# Altium PCB PCB2.PcbDoc (part 3 of 3)
Units mm, origin at the board's own origin, x right, y up, seen from the top; angles counter-clockwise.
Board outline 152.4 x 101.6 mm, 4 copper layers (Top Layer, Int1 (GND), Int2 (PWR), Bottom Layer), stack 1.569 mm thick; 115 components, 81 nets, 561 pads, 241 vias.
Unrouted connection lines stored in the file: 9.
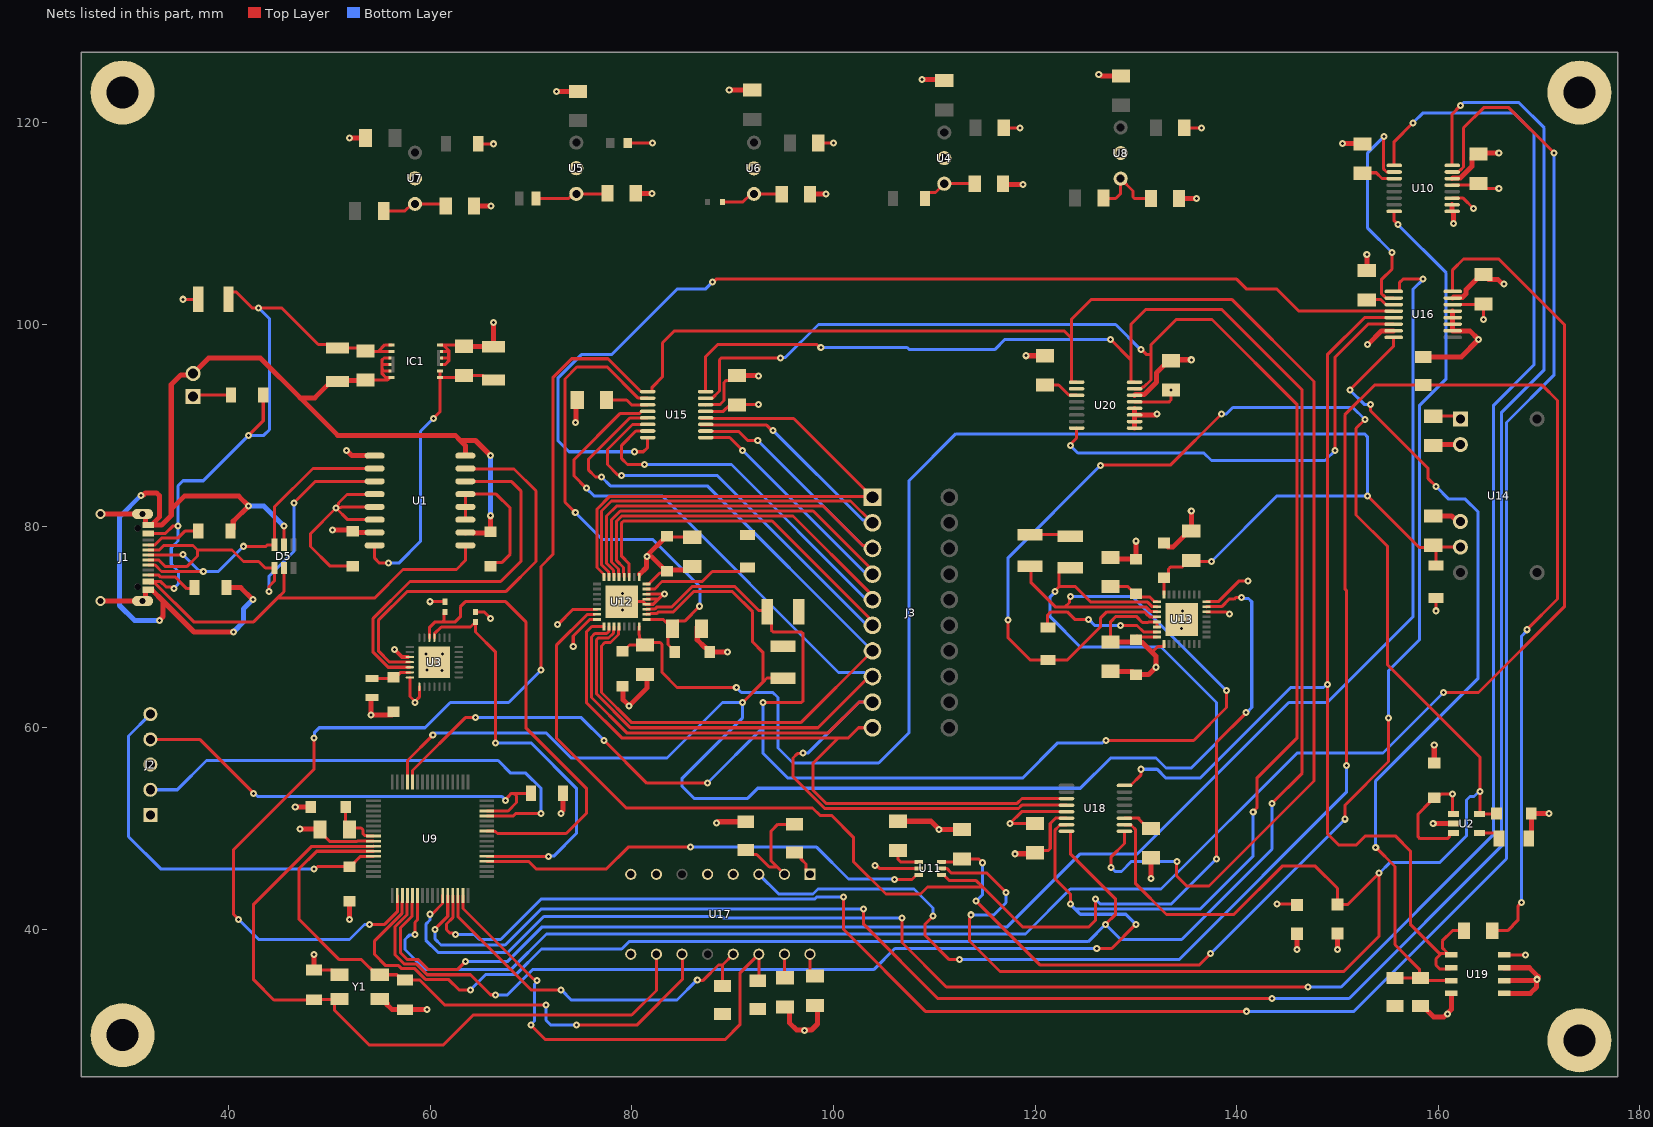
[diagram p4: the nets of this part, all layers, seen from the top]

## Via types
v1: diameter 0.7, hole 0.3, Top Layer to Bottom Layer, 241 vias

## Nets (pads, with @x,y where several pads share a name; then routed paths per layer and width w, separated by ;. In a path a pad name is that pad's centre, name@x,y a point inside that pad or via, vN(x,y) a via of type N, cw(c..) or ccw(c..) an arc to the next point about the centre after c; other vN are vias at no path point) (continued)
2Y6: U11.4 U12.15 U13.15 | length 130.5
  Top Layer w0.3: U12.15@76.295,71.237 75.587,71.237 72.525,68.175 72.525,58.975 79.45,52.05 97.937,52.05 98.679,51.308 99.822,51.308 101.981,49.149 101.981,46.736 105.217,43.5 108.633,43.5 109.329,44.196 114.804,44.196 ; U11.4@110.725,45.4 110.95,45.4 111.519,44.831 114.169,44.831 114.804,44.196 ; v1(126,43) 126,40.9 125.35,40.25 118.75,40.25 114.804,44.196 ; U13.15@137,72 137.013,72.013 138.513,72.013 139.252,72.752 139.752,72.752 139.922,72.922 140.453,72.922 v1(140.475,72.9) ; v1(138,47) 138,58.553 v1(140.947,61.5)
  Bottom Layer w0.3: v1(126,43) 126.5,42.5 133.5,42.5 v1(138,47) ; v1(140.475,72.9) 140.552,72.823 141.177,72.823 141.5,72.5 141.5,62 141,61.5 v1(140.947,61.5)
5V_ISO: C2.2 C4.2 C6.2 C22.1 C38.2 C40.2 C46.1 C47.1 C49.1 D3.2 F1.2 IC1.7 IC1.8 R4.2 R5.2 R6.2 R8.2 R12.2 U1.16 U2.1 U2.3 U3.7 U3.8 U10.11 U10.13 U12.14 U13.14 U14.1 U15.13 U16.14 U18.13 U19.8 U20.13 | length 100.7
  Top Layer w0.3: v1(35.5,102.5) F1.2@37,102.5 ; U1.16@54.5,78.094 54.5,76.818 54.991,76.327 v1(55.88,76.327) ; U3.7@58,65 58,63.108 58.5,62.608 v1@58.5,62.606 ; v1(58.5,62.5) v1@58.5,62.606 ; U3.8@58.925,64.075 58.925,63.031 v1@58.5,62.606 ; v1(60.325,90.678) 60.96,91.313 IC1.7@60.96,94.727 ; IC1.8@60.96,95.377 IC1.7@60.96,94.727 ; C4.2@63.348,94.967 63.108,94.727 IC1.7@60.96,94.727 ; C4.2@63.373,94.943 65.24,94.943 65.694,94.489 C2.2@66.294,94.489 ; R6.2@64.775,117.925 v1(66.275,117.925) ; v1(72.65,70.225) 74.175,71.75 U12.14@76.548,71.75 ; R4.2@79.59,117.983 v1(82.042,117.983) v1@82.025,118 ; U15.13@87.33,91.384 87.861,91.384 87.884,91.361 87.907,91.384 89.084,91.384 89.75,92.05 C40.2@90,92.05 ; C40.2@90.674,92.022 90.727,92.075 v1(92.583,92.075) ; R5.2@98.5,118 v1(100,118) ; R8.2@116.9,119.5 v1(118.5,119.5) ; C47.1@120,50.5 v1(117.5,50.5) 118.675,51.675 U18.13@123.125,51.675 ; U20.13@129.875,92.325 133.324,92.325 133.5,92.501 v1(133.5,93.5) ; R12.2@134.8,119.5 v1(136.5,119.5) ; U13.14@137,71.5 138.967,71.5 139.192,71.275 v1(139.3,71.275) ; v1(144,42.5) 145.93,42.5 D3.2@146,42.43 ; C38.2@159.5,90.9 161.91,90.9 U14.1@162.19,90.62 ; C6.2@159.6,53.05 159.525,53.05 159.15,52.675 159.15,52.6 158,51.45 158,49.176 158.176,49 160.924,49 161.1,49.176 161.1,49.4 161.25,49.55 U2.3@161.5,49.55 ; C6.2@159.906,53.03 160.299,53.423 v1(161.423,53.423) 161.423,51.527 U2.1@161.5,51.45 ; U10.11@161.375,112.525 162.475,112.525 v1(163.5,111.5) ; U10.13@161.375,113.825 163.825,113.825 C22.1@164,114 164.5,113.5 v1(166,113.5) ; U16.14@161.425,101.975 163.975,101.975 C46.1@164,102 ; v1(164.5,100.5) C46.1@164.5,102.05 ; U19.8@166.54,37.465 v1(168.656,37.465)
  Bottom Layer w0.3: v1(55.88,76.327) 56.896,76.327 59.055,78.486 59.055,89.408 v1(60.325,90.678)
9V: C27.2 C28.2 C35.2 C36.2 C37.2 R26.2 U12.24 U13.24 U14.6 | length 158.4
  Top Layer w0.3: C28.2@79.075,67.575 79.15,67.575 79.775,68.2 C27.2@81.325,68.2 ; U12.24@80.75,70.048 80.737,70.035 80.737,69.213 80.75,69.2 80.75,68.95 C27.2@81.25,68.45 ; C27.2@81.5,68.45 82.824,68.45 83,68.274 83,65.5 84.5,64 v1(90.369,64) ; U13.24@132.798,73.202 132.798,74.999 132.998,74.999 133.248,75.249 133.248,75.749 133.423,75.925 134.575,75.925 135.25,76.6 C35.2@135.5,76.6 ; C35.2@135.545,76.5 v1(137.5,76.5) ; v1@153.016,82.984 158.121,77.879 159.279,77.879 C37.2@159.5,78.1 159.766,77.834 R26.2@159.766,76.073 ; C37.2@159.68,77.92 U14.6@162.19,77.92
  Bottom Layer w0.3: v1(90.369,64) 90.869,63.5 94,63.5 94.5,63 94.5,58 96,56.5 104.5,56.5 107.5,59.5 107.5,84.5 112.15,89.15 152.674,89.15 153,88.824 v1(153,83) 144,83 v1(137.5,76.5)
D: C24.2 U10.8 U11.6 | length 120.4
  Top Layer w0.3: U11.6@110.725,46.7 112.736,46.7 112.776,46.74 C24.2@112.776,46.99 114.427,46.99 v1(114.808,46.609) ; v1(114.148,42.799) 114.173,42.799 120.523,36.449 136.271,36.449 v1(137.414,37.592) ; v1(150.749,50.927) 150.749,52.324 155.067,56.642 v1(155.067,60.96) ; U10.8@155.625,111.225 155.625,110.286 v1(156.005,109.906)
  Bottom Layer w0.3: v1(114.148,42.799) 114.808,43.459 v1(114.808,46.609) ; v1(137.414,37.592) v1(150.749,50.927) ; v1(155.067,60.96) 155.067,65.659 158.115,68.707 158.115,91.948 160.782,94.615 160.782,105.129 v1(156.005,109.906)
DA: R33.2 R34.2 U16.8 U19.3 | length 83.4
  Top Layer w0.3: v1(151.227,93.502) 155.554,97.83 U16.8@155.554,98.725 ; v1(153.274,92.075) 153.274,91.455 159.004,85.725 159.004,84.709 v1(159.766,83.947) ; v1(153.797,48.133) 155.702,46.228 155.702,38.481 158.127,36.056 158.127,35.522 R34.2@158.242,35.407 ; R33.2@155.702,35.182 R34.2@158.242,35.182 ; R34.2@158.366,35.306 158.747,34.925 U19.3@161.29,34.925
  Bottom Layer w0.3: v1(151.227,93.502) 152.654,92.075 v1(153.274,92.075) ; v1(153.797,48.133) 153.797,54.737 163.957,64.897 163.957,81.407 162.687,82.677 161.036,82.677 v1(159.766,83.947)
DATA_N: U1.6 U3.5 | length 37.5
  Top Layer w0.3: U3.5@58,66 55.839,66 54.35,67.489 54.35,70.85 58,74.5 67,74.5 69,76.5 69,83.5 68.095,84.405 U1.6@63.5,84.405
DATA_P: U1.7 U3.4 | length 39.6
  Top Layer w0.3: U3.4@58,66.5 55.975,66.5 54.9,67.575 54.9,70.7 57.7,73.5 67.5,73.5 70.5,76.5 70.5,83.5 68.325,85.675 U1.7@63.5,85.675
DN1: D5.4 J1.A7 J1.B7 U1.11 | length 41
  Top Layer w0.3: J1.A7@32.075,76.638 32.573,76.638 32.575,76.64 33.088,76.64 33.728,76 33.99,76 33.997,76.007 35.905,76.007 36.925,77.027 36.925,77.64 ; J1.B7@32.075,77.64 33.14,77.64 33.575,78.075 36.49,78.075 36.925,77.64 ; v1(44,73.5) 44.016,73.516 44.016,74.016 44.55,74.55 D5.4@44.55,75.85 43.65,75.85 43,76.5 41.493,76.5 40.353,77.64 36.925,77.64 ; v1(46.482,82.296) 48.63,84.444 U1.11@54.5,84.444
  Bottom Layer w0.3: v1(44,73.5) 44,75 46.482,77.482 v1(46.482,82.296)
DP1: D5.3 J1.A6 J1.B6 U1.10 | length 35.3
  Top Layer w0.3: J1.B6@32.061,76.138 32.725,76.138 33.364,75.5 v1(37.5,75.5) ; J1.A6@32.061,77.138 35.438,77.138 v1(35.475,77.175) ; v1(41.5,78) 43.72,78 43.87,78.15 D5.3@44.55,78.15 44.55,81.888 48.376,85.714 U1.10@54.5,85.714
  Bottom Layer w0.3: v1(35.475,77.175) 37.073,75.577 37.423,75.577 v1(37.5,75.5) 39,75.5 v1(41.5,78)
GND_ISO: C2.1 C4.1 C5.1 C6.1 C8.1 C9.1 C10.1 C11.1 C12.1 C13.1 C14.1 C15.1 C16.1 C17.1 C18.2 C19.1 C20.2 C21.1 C22.2 C23.1 C24.1 C25.1 C25.2 C26.1 C26.2 C27.1 C28.1 C29.1 C30.1 C31.1 C31.2 C32.1 C32.2 C33.1 C34.1 C35.1 C36.1 C37.1 C38.1 C39.1 C40.1 C41.2 C42.2 C43.2 C44.1 C45.1 C46.2 C47.2 C48.1 C49.2 D1.1 D2.1 D3.1 D4.1 IC1.9 IC1.10 IC1.11 IC1.12 J2.3 pad.MH1 pad.MH2 pad.MH3 pad.MH4 R13.1 R14.1 R15.1 R16.1 R18.1 R19.1 R26.1 R29.1 R30.2 R34.1 U1.9 U1.15 U2.2 U3.3 U3.29 U4.2 U5.2 U6.2 U7.2 U8.2 U9.9 U10.9 U10.10 U10.14 U11.2 U12.1 U12.16 U12.28 U12.29 U12.30 U12.32 U12.HTAB U13.1 U13.16 U13.29 U13.30 U13.32 U13.HTAB U14.2 U14.5 U15.14 U16.7 U16.10 U16.11 U16.12 U16.13 U16.15 U17.4 U17.5 U17.7 U17.8 U17.9 U18.14 U19.4 U19.5 U19.6 U19.7 U20.9 U20.10 U20.11 U20.12 U20.14 Y1.2 Y1.4 | length 271.2
  Top Layer w0.3: C17.1@48.525,35.95 50.25,35.95 50.7,35.5 Y1.4@51,35.5 ; C42.2@49.096,49.911 49.096,49.661 50.046,48.711 52.77,48.711 52.809,48.75 U9.9@54.374,48.75 ; C8.1@52.325,79.475 C8.1@52.436,79.364 ; U1.9@53.8,86.945 U1.9@54.5,86.945 ; Y1.2@55,33.1 55.3,33.1 Y1.2@55.75,32.65 ; C11.1@56.2,61.25 C11.1@56.5,61.55 ; v1(60,72.5) D2.1@61.5,72.5 ; U3.29@60.425,66.5 v1(61.25,67.325) ; IC1.12@60.96,97.977 61.281,97.977 ; IC1.9@61.11,96.027 61.125,96.012 61.468,96.012 61.849,96.393 61.849,96.772 ; IC1.10@61.11,96.677 61.754,96.677 61.849,96.772 ; IC1.11@61.11,97.327 61.673,97.327 61.849,97.151 ; C4.1@63.373,97.843 63.239,97.977 61.281,97.977 ; D1.1@64.5,71.5 65.351,71.5 v1(66,70.851) ; v1(73,51.5) 73,51.608 73.2,51.808 ; v1(74.2,68.075) 74.2,69.1 75.85,70.75 U12.16@76.548,70.75 ; U12.HTAB@79,72.5 81.14,72.5 U12.28@81.39,72.25 ; U12.1@80.75,74.952 U12.1@80.75,75.192 ; U12.28@81.452,72.25 82.142,72.25 82.642,72.75 ; U12.29@81.452,72.75 82.642,72.75 ; U12.30@81.452,73.25 v1@83.142,73.25 ; U12.32@81.452,74.25 81.692,74.25 82.792,75.35 83.2,75.35 C25.1@83.5,75.65 ; v1@81.577,76.923 82.027,76.923 ; v1(83.25,73.25) v1@83.142,73.25 ; C25.2@83.35,78.9 C26.2@86,78.9 ; C26.1@85.65,75.65 C26.1@86,76 ; U15.14@87.33,92.034 87.34,92.044 88.724,92.044 88.9,92.219 89.147,92.467 89.147,93.211 89.154,93.218 89.154,94.246 89.33,94.422 89.547,94.422 89.75,94.625 89.75,94.95 C40.1@90,94.95 ; C30.1@87.35,67.95 C30.1@87.725,67.575 ; v1(104.14,46.355) 104.248,46.355 104.553,46.05 U11.2@108.5,46.05 ; C47.2@120,47.6 120.237,47.837 121.337,47.837 121.512,48.012 121.512,50.512 122.025,51.025 U18.14@123.125,51.025 ; v1(126.324,124.79) 126.432,124.79 v1@126.582,124.64 ; C31.1@127.5,68.5 127.5,70.525 128.025,71.05 130.05,71.05 130.65,70.45 131.205,70.45 131.243,70.487 132.082,70.487 U13.29@132.095,70.5 U13.30@132.095,70 ; C34.1@127.5,76.4 C34.1@127.775,76.675 ; C32.2@129.675,65.6 C32.2@130,65.275 ; C32.1@129.775,68.5 C32.1@130,68.725 ; C32.1@130.1,69 U13.32@132.095,69 ; 131.613,67.487 132.185,68.06 132.785,68.06 132.798,68.073 U13.1@132.798,68.298 ; C36.1@132.798,78.324 C36.1@133.173,77.949 ; C49.2@133.25,96.4 C49.2@133.5,96.4 ; v1(134.548,69.825) U13.HTAB@134.548,70.75 ; C35.1@135.25,79.5 C35.1@135.5,79.5 ; U13.16@137,72.5 138.175,72.5 140.25,74.575 v1(141.125,74.575) ; v1(159.766,71.603) R26.1@159.766,72.873 ; U14.5@161.865,80.46 U14.5@162.19,80.46 ; C46.2@164.5,104.95 C46.2@165,104.45 ; C9.1@168.975,49 C9.1@169.225,49.25 ; 61.281,97.977 61.849,97.409 61.849,97.151 ; 61.849,96.772 61.849,97.151 ; 82.642,72.75 v1@83.142,73.25
  Top Layer w0.4: v1(56.475,67.75) 57.225,67 U3.3@57.825,67
  Top Layer w0.425: U12.1@80.75,75.192 U12.1@80.787,75.229
  Top Layer w0.5: v1(46.625,52.125) C21.1@48.175,52.125 ; v1(47.1,49.95) 49.057,49.95 C42.2@49.096,49.911 ; v1(48.5,37.5) C17.1@48.5,35.975 C17.1@48.525,35.95 ; v1(50.3,79.6) 52.2,79.6 C8.1@52.225,79.575 ; v1(51.689,87.503) 51.743,87.503 52.262,86.984 53.761,86.984 U1.9@53.8,86.945 ; v1(52,41) C19.1@52,42.775 ; v1(52,118.5) C15.1@53.6,118.5 ; C8.1@52.436,79.364 U1.15@54.5,79.364 ; v1(54.15,61.25) 54.15,62.925 C10.1@54.225,63 ; v1@54.2,61.3 54.2,61.292 54.242,61.25 C11.1@56.2,61.25 ; Y1.2@55.75,32.65 55.75,32.525 56.243,32.032 57.493,32.032 C18.2@57.5,32.025 57.55,32.075 v1(59.7,32.075) ; C4.1@63.373,97.843 63.4,97.816 66.267,97.816 C2.1@66.294,97.789 v1(66.294,100.203) ; R15.1@64.35,111.75 v1(66.05,111.75) ; v1(72.526,123.116) C12.1@74.676,123.116 ; 73.2,51.808 R19.1@73.2,53.5 ; v1(74.422,90.297) 74.46,90.335 74.46,92.36 C39.1@74.6,92.5 ; C28.1@79.075,64.125 79.15,64.05 79.15,62.775 v1(79.75,62.175) 81.5,63.925 C27.1@81.5,65.55 ; R14.1@80.4,113 v1(82,113) ; U12.1@80.787,75.229 81.462,75.904 81.462,76.962 v1(81.5,77) ; v1@81.577,76.923 v1(81.5,77) ; 82.027,76.923 83.425,75.525 C25.1@83.5,75.525 ; C25.2@83.35,78.9 81.5,77.05 v1(81.5,77) ; C25.1@83.5,75.65 C26.1@85.65,75.65 ; C29.1@86.5,70 86.5,68.725 87.275,67.95 C30.1@87.35,67.95 ; C30.1@87.725,67.575 C30.1@87.725,67.5 v1(89.5,67.5) ; v1(88.392,50.546) 88.446,50.546 88.578,50.678 91.312,50.678 R30.2@91.313,50.679 ; v1(89.673,123.243) C14.1@91.948,123.243 ; C40.1@90.501,94.945 92.453,94.945 92.529,94.869 v1(92.583,94.869) ; C41.2@95.2,32.3 95.231,32.3 95.631,31.9 95.631,30.734 96.355,30.01 97.117,30.01 v1(97.155,29.972) 97.193,30.01 97.824,30.01 98.425,30.611 98.425,32.205 C43.2@98.171,32.459 ; R16.1@97.675,112.93 v1(99.275,112.93) ; C23.1@106.426,50.726 109.675,50.726 v1(110.49,49.911) 110.511,49.89 C24.1@112.776,49.89 ; v1(108.798,124.285) 110.898,124.285 C13.1@110.998,124.185 ; R13.1@116.825,113.95 116.875,113.9 v1(118.825,113.9) ; v1(118,47.5) 119.9,47.5 C47.2@120,47.6 ; v1(119.1,96.9) C48.1@121,96.9 ; v1@126.582,124.64 C16.1@128.524,124.64 ; C34.1@127.275,76.725 C33.1@130,76.725 v1(130,78.5) ; C31.2@127.5,65.6 C32.2@129.675,65.6 ; C31.1@127.5,68.5 C32.1@129.775,68.5 ; U20.9@129.875,89.725 U20.11@129.875,91.025 ; U20.12@129.875,91.675 U20.11@129.875,91.025 ; U20.14@129.875,92.975 129.95,93.05 130.828,93.05 132.05,94.272 132.05,95.2 C49.2@133.25,96.4 ; C32.2@130,65.275 131.275,65.275 v1(132,66) 132,67.1 131.613,67.487 130.65,68.45 130.35,68.45 130.1,68.7 C32.1@130.1,69 ; v1(131.5,45.05) C45.1@131.5,47.1 ; v1(132.1,91.1) 132.046,91.1 131.971,91.025 U20.11@129.875,91.025 ; C36.1@133.173,77.949 133.699,77.949 C35.1@135.25,79.5 ; C49.2@133.5,96.4 133.6,96.5 v1(135.5,96.5) ; R18.1@134.3,112.5 v1(136,112.5) ; C35.1@135.5,79.5 v1(135.5,81.5) ; v1(146,38) D3.1@146,39.57 ; v1(149.987,38.021) D4.1@149.987,39.591 ; v1(150.5,117.95) 152.45,117.95 C20.2@152.5,117.9 ; C44.1@152.908,105.336 v1(152.908,106.936) ; v1(153,98) 154.365,99.365 155.565,99.365 U16.7@155.575,99.375 ; R34.1@158.242,32.382 158.467,32.382 159.518,31.331 160.563,31.331 160.855,31.623 v1(160.909,31.623) 160.909,31.677 161.29,32.058 U19.4@161.29,33.655 ; R29.1@158.496,96.78 162.28,96.78 v1(164,98.5) 163.125,99.375 U16.10@161.425,99.375 U16.11@161.425,100.025 U16.12@161.425,100.675 U16.13@161.425,101.325 ; v1(159.5,50.5) U2.2@161.5,50.5 ; C37.1@159.5,81 161.325,81 161.674,80.651 161.728,80.651 161.865,80.514 U14.5@161.865,80.46 ; C38.1@159.5,88 159.58,88.08 U14.2@162.19,88.08 ; C6.1@159.6,56.5 v1(159.6,58.275) ; U10.10@161.375,111.875 U10.9@161.375,111.225 161.425,111.225 161.5,111.15 v1(161.5,110) ; U10.14@161.375,114.475 161.45,114.55 162.213,114.55 163.35,115.687 163.35,116.5 163.75,116.9 C22.2@164,116.9 164.1,117 v1(166,117) ; U16.15@161.425,102.625 161.5,102.7 162.413,102.7 162.75,103.037 162.75,103.45 164.35,105.05 C46.2@164.5,105.05 ; C46.2@165,104.45 165.942,104.45 166.292,104.1 166.346,104.1 166.446,104 v1(166.5,104) ; U19.5@166.54,33.655 169.125,33.655 169.761,34.291 v1@169.761,35.014 ; U19.6@166.54,34.925 169.618,34.925 169.745,35.052 v1(169.799,35.052) ; U19.7@166.54,36.195 169.037,36.195 v1@169.93,35.302 ; C9.1@169.225,49.25 C5.1@169.225,51.5 v1(171,51.5)
  other v1: 61.2,65.7 59.675,65.725 59.6,67.325 134.648,71.563 79.1,71.687 79.1,73.313
NetC7_2: C7.2 U1.3 U1.4 U1.5 | length 14.6
  Top Layer w0.3: U1.3@63.5,80.634 U1.4@63.5,81.904 U1.5@63.5,83.174 66.559,83.174 67.945,81.788 67.945,77.216 67.104,76.375 66.375,76.375 C7.2@66,76
NetC8_2: C8.2 U1.12 U1.13 U1.14 | length 22.6
  Top Layer w0.3: C8.2@52.325,76.025 50.086,76.025 48.133,77.978 48.133,79.248 v1(50.673,81.788) ; U1.14@54.5,80.595 54.461,80.634 51.827,80.634 v1(50.673,81.788) ; U1.13@54.5,81.904 51.193,81.904 51.153,81.865 50.75,81.865 v1(50.673,81.788) ; U1.12@54.5,83.135 51.766,83.135 50.922,82.291 50.922,82.145 50.673,81.896 v1(50.673,81.788)
NetC9_2: C9.2 U2.4 | length 2.3
  Top Layer w0.3: U2.4@164.1,49.55 165.65,49.55 166.025,49.175 C9.2@166.025,49
NetC19_2: C19.2 J2.5 U9.12 | length 39.1
  Top Layer w0.3: v1(48.5,46) 48.608,46 48.833,46.225 C19.2@52,46.225 ; C19.2@52.075,46.225 53.1,47.25 U9.12@54.374,47.25
  Bottom Layer w0.3: J2.5@32.25,61.35 30.075,59.175 30.075,49.2 33.275,46 v1(48.5,46)
NetC20_1: C20.1 U10.3 | length 2.9
  Top Layer w0.3: C20.1@153,115.05 153.85,115.05 154.415,114.485 155.615,114.485 U10.3@155.625,114.475
NetC39_2: C39.2 U15.3 | length 4.3
  Top Layer w0.3: C39.2@77.5,92.5 79.5,92.5 79.966,92.034 U15.3@81.58,92.034
NetC44_2: C44.2 U16.3 | length 2.8
  Top Layer w0.3: C44.2@153,102.5 154.278,102.5 154.794,101.985 155.565,101.985 U16.3@155.575,101.975
NetC45_2: C45.2 U18.3 | length 3.1
  Top Layer w0.3: U18.3@128.875,51.025 130.299,51.025 130.299,50.951 131.25,50 C45.2@131.5,50
NetC48_2: C48.2 U20.3 | length 3.5
  Top Layer w0.3: C48.2@121,94 122.35,94 123.365,92.985 124.115,92.985 U20.3@124.125,92.975
NetDS1_1: DS1.1 R1.1 | length 3.8
  Top Layer w0.3: DS1.1@36.5,92.86 36.64,93 R1.1@40.25,93
NetJ1_A5: J1.A5 R3.1 | length 5
  Top Layer w0.3: J1.A5@32.061,78.138 32.71,78.138 33.41,78.838 35.012,78.838 35.674,79.5 R3.1@36.5,79.5
NetJ1_B5: J1.B5 R2.2 | length 5.1
  Top Layer w0.3: J1.B5@32.075,75.14 33.087,75.14 33.289,74.938 34.737,74.938 35.874,73.801 36.526,73.801 R2.2@36.625,73.9
NetJ2_2: J2.2 U9.45 | length 49.1
  Top Layer w0.3: U9.45@65.626,51.25 68.26,51.25 68.526,51.516 v1(71,51.516)
  Bottom Layer w0.3: J2.2@32.25,53.85 34.925,53.85 37.825,56.75 66.75,56.75 68,55.5 69.5,55.5 71,54 v1(71,51.516)
NetJ2_4: J2.4 R19.2 U9.46 | length 45
  Top Layer w0.3: J2.4@32.25,58.85 37.15,58.85 v1(42.5,53.5) ; U9.46@65.626,51.75 67.75,51.75 68.575,52.575 68.575,53.225 68.3,53.5 ; v1(67.5,52.8) 67.5,52.908 67.839,53.248 67.839,53.288 68.051,53.5 68.3,53.5 ; R19.2@70,53.5 68.3,53.5
  Bottom Layer w0.3: v1(42.5,53.5) 42.576,53.5 42.876,53.2 67.1,53.2 v1(67.5,52.8)
NetR7_1: R7.1 R14.2 U5.1 | length 7.3
  Top Layer w0.3: R7.1@70.5,112.5 73.742,112.5 74.202,112.96 U5.1@74.5,112.96 77.56,112.96 R14.2@77.6,113
NetR9_1: R9.1 R15.2 U7.1 | length 6.5
  Top Layer w0.3: R9.1@55.401,111.252 57.494,111.252 58.202,111.96 U7.1@58.5,111.96 61.34,111.96 R15.2@61.55,111.75
NetR10_1: R10.1 R16.2 U6.1 | length 6.2
  Top Layer w0.3: R10.1@88.993,112.141 91.018,112.141 91.827,112.95 U6.1@92.125,112.95 94.855,112.95 R16.2@94.875,112.93
NetR11_1: R11.1 R13.2 U4.1 | length 5.9
  Top Layer w0.3: R11.1@109.1,112.5 109.1,112.75 109.45,113.1 110.14,113.1 U4.1@111,113.96 111.02,113.98 R13.2@114.055,113.98 ; R13.2@114.025,113.95 R13.2@114.145,113.83
NetR17_1: R17.1 R18.2 U8.1 | length 7.3
  Top Layer w0.3: R17.1@127,112.5 128,112.5 128.5,113 U8.1@128.5,114.46 129.71,113.25 129.71,112.64 129.85,112.5 R18.2@131.5,112.5
NetR20_1: R20.1 U12.31 | length 10.9
  Top Layer w0.3: U12.31@81.452,73.75 82.25,73.75 83,74.5 87,74.5 88,75.5 90.724,75.5 90.774,75.55 91.15,75.55 R20.1@91.5,75.9
NetR21_1: R21.1 R24.1 U9.60 U12.27 U13.27 | length 165.5
  Top Layer w0.3: U9.60@58.25,54.626 58.25,55.75 63.5,61 v1(64.5,61) ; v1(77.249,58.751) 81.5,54.5 v1(87.5,54.5) ; U12.27@81.452,71.75 81.465,71.763 81.811,71.763 81.848,71.8 82.328,71.8 82.528,72 84,72 86,74 90.222,74 92.576,71.646 93.279,71.646 R21.1@93.425,71.5 93.85,71.075 93.85,69.676 94.026,69.5 96.824,69.5 97,69.324 97,62.676 96.824,62.5 v1(93,62.5) ; R24.1@119.5,76 119.621,75.879 119.621,74.379 122,72 123,72 ; v1(123.5,73) 123.423,72.923 123.423,72.423 123,72 ; v1(127.048,58.735) 135.735,58.735 139,62 v1(139,63.679) ; U13.27@132.095,71.5 132.082,71.513 131.503,71.513 131.403,71.613 131.382,71.613 130.995,72 123,72
  Bottom Layer w0.3: v1(64.5,61) 75,61 v1(77.249,58.751) ; v1@87.516,54.516 93,60 ; v1(93,62.5) 93,60 ; v1(123.5,73) 129.679,73 v1(139,63.679) ; v1(127.048,58.735) 126.94,58.735 126.705,58.5 122.25,58.5 118.75,55 95.5,55 93,57.5 93,60
NetR22_1: R22.1 R25.1 U9.61 U12.26 U13.26 | length 172.5
  Top Layer w0.3: U9.61@57.75,54.626 57.75,56.75 v1(60.265,59.265) ; U12.26@81.452,71.25 81.465,71.263 81.811,71.263 81.861,71.313 82.477,71.313 82.665,71.5 84.136,71.5 86.136,73.5 90,73.5 92,71.5 92,68.5 93,67.5 93,64.5 ; v1(91,62.5) 93,64.5 ; R22.1@95,64.925 93.425,64.925 93,64.5 ; v1(122,73.5) 122,73.608 122.4,74.008 122.4,75.425 122.825,75.85 R25.1@123.5,75.85 ; 122.5,74 124,74 125.55,72.45 131.181,72.45 131.619,72.013 132.082,72.013 U13.26@132.095,72
  Bottom Layer w0.3: v1(60.265,59.265) 60.5,59.5 71.5,59.5 74,57 83.5,57 89,62.5 v1(91,62.5) 91,61 85,55 85,54.176 86.176,53 91.5,53 92.5,54 124.5,54 127.5,57 132,57 133,56 135.5,56 138,58.5 138,62.5 132.5,68 124.5,68 121.5,71 121.5,73 v1(122,73.5)
NetR23_1: R23.1 U13.31 | length 13.1
  Top Layer w0.3: R23.1@121.3,69.925 121.25,69.975 121.25,71.167 121.575,71.492 123.197,71.492 123.938,70.75 v1(125.325,70.75) ; v1(128.5,70.15) 130.124,70.15 130.774,69.5 U13.31@132.095,69.5
  Bottom Layer w0.3: v1(125.325,70.75) 125.925,70.15 v1(128.5,70.15)
NetR28_1: R28.1 R29.2 U17.3 | length 188.4
  Top Layer w0.3: v1(109.9,41.325) 109.1,40.525 109.1,39.4 111.5,37 v1(112.5,37) ; v1(150.876,56.261) 150.876,73.627 150.725,73.778 150.725,91.035 153.664,93.974 158.49,93.974 R29.2@158.496,93.98 170.307,93.98 171.831,92.456 171.831,72.771 v1(168.783,69.723) ; R28.1@165.357,39.878 166.878,39.878 167.894,40.894 167.894,42.291 v1(168.275,42.672)
  Bottom Layer w0.3: U17.3@92.606,45.463 94.569,43.5 97.98,43.5 98.48,44 108,44 109.875,42.125 109.875,41.35 v1(109.9,41.325) ; v1(112.5,37) 134.282,37 150.876,53.594 v1(150.876,56.261) ; v1(168.275,42.672) 168.275,69.107 168.783,69.615 v1(168.783,69.723)
NetU9_18: U9.18 U15.1 U18.1 U20.1 | length 260.2
  Top Layer w0.3: v1(41,41) 40.5,41.5 40.5,47.9 48.5,55.9 v1(48.5,59) ; v1(54,40.5) 55.5,40.5 56.75,41.75 U9.18@56.75,43.374 ; v1(71,65.706) 71,76 72.175,77.175 72.175,94.725 74.05,96.6 77.644,96.6 80.9,93.344 82.008,93.344 82.022,93.357 82.022,93.776 83.058,94.812 83.058,98.183 84.25,99.375 122.875,99.375 123.6,98.65 ; U20.1@124.125,94.275 123.623,94.275 123.6,94.298 123.6,98.65 ; v1(127.55,46.15) 127.55,47.2 128.875,48.525 U18.1@128.875,49.725 ; v1(134.075,46.75) 134.025,46.7 134.025,45.325 135.038,44.312 137.263,44.312 147.675,54.725 147.675,94.335 139.51,102.5 125.614,102.5 123.6,100.486 123.6,98.65
  Bottom Layer w0.3: v1(41,41) 43,39 52,39 53.484,40.484 53.984,40.484 v1(54,40.5) ; v1(48.5,59) 48.516,59.016 48.516,59.516 49,60 59.5,60 62,62.5 67.794,62.5 v1(71,65.706) ; v1(127.55,46.15) 127.95,45.75 128.575,45.75 129.575,46.75 v1(134.075,46.75)
NetU9_19: U9.19 U15.16 U18.16 U20.16 | length 237.8
  Top Layer w0.3: U9.19@57.25,43.374 57.24,43.364 57.24,42.685 57.2,42.645 57.2,41.564 54.5,38.864 54.5,37.5 55.6,36.4 56.889,36.4 57.189,36.1 58.477,36.1 59.527,35.05 61.814,35.05 62.864,34 v1(64,34) ; U15.16@87.33,93.334 87.33,96.83 88.5,98 98.374,98 98.649,97.725 v1(98.75,97.725) ; U18.16@123.125,49.725 123.477,49.725 123.5,49.702 123.5,47.5 128,43 128,41.5 v1(127,40.5) ; v1(127.5,98.5) 129.5,96.5 ; U20.16@129.875,94.275 129.523,94.275 129.5,94.298 129.5,96.5 ; v1(143.5,52.5) 146.5,55.5 146.5,91 146.5,93.5 138.5,101.5 131,101.5 129.5,100 129.5,96.5
  Bottom Layer w0.3: v1(64,34) 65.505,35.505 68.505,35.505 71.05,38.05 78.998,38.05 79.723,38.775 125.275,38.775 v1(127,40.5) 128.5,39 134.55,39 143.5,47.95 v1(143.5,52.5) ; v1(98.75,97.725) 107.317,97.725 107.542,97.5 116,97.5 117,98.5 v1(127.5,98.5)
NetU9_20: U9.20 U15.15 U18.15 U20.15 | length 242.8
  Top Layer w0.3: U9.20@57.75,43.374 57.74,43.364 57.74,42.685 57.69,42.635 57.69,41.417 56.5,40.227 56.5,37.5 57.45,36.55 58.663,36.55 59.713,35.5 64,35.5 65.984,33.516 66.484,33.516 v1(66.5,33.5) ; U15.15@86.885,92.635 87.934,92.635 88.695,93.395 88.695,96.499 88.87,96.675 v1(94.75,96.675) ; U18.15@123.125,50.375 122.511,50.375 122.336,50.2 122.328,50.2 122,49.872 122,45 123.5,43.5 v1(123.5,42.5) ; v1(126.125,38.1) 127.6,38.1 v1(130,40.5) ; U20.15@129.875,93.625 130.489,93.625 130.664,93.8 130.8,93.8 131.5,94.5 131.5,97 ; v1(130.5,97.5) 130.576,97.5 131.076,97 131.5,97 ; v1(141.645,51.655) 141.645,51.676 142,52.031 142,55 146,59 146,92.05 137.55,100.5 134,100.5 131.5,98 131.5,97
  Bottom Layer w0.3: v1(66.5,33.5) 67.663,33.5 70.163,36 104,36 106.1,38.1 v1(126.125,38.1) ; v1(94.75,96.675) 94.791,96.716 95.241,96.716 98.525,100 128,100 v1(130.5,97.5) ; v1(123.5,42.5) 124,42 ; v1(130,40.5) 129,41.5 124.5,41.5 124,42 ; v1(141.645,51.655) 141.645,47.27 136.375,42 124,42
NetU9_21: U9.21 U16.1 | length 159.7
  Top Layer w0.3: U9.21@58.25,43.374 58.24,43.364 58.24,42.685 58.19,42.635 58.19,41.281 57.074,40.164 57.074,37.676 57.749,37 58.85,37 59.85,36 62.7,36 v1(63.5,36.8) ; U16.1@155.575,103.275 156.152,103.275 156.175,103.298 156.175,104.175 156.5,104.5 v1(158.5,104.5)
  Bottom Layer w0.3: v1(63.5,36.8) 67.664,36.8 71.123,40.259 117.259,40.259 124.5,47.5 130.177,47.5 145.177,62.5 149,62.5 157.48,70.98 157.48,103.48 v1(158.5,104.5)
NetU9_22: U9.22 U16.16 | length 181.3
  Top Layer w0.3: v1(58.5,39.5) 58.5,40.7 58.75,40.95 U9.22@58.75,43.374 ; v1(160.528,63.5) 164,63.5 172.5,72 172.5,100 166,106.5 162.5,106.5 161.425,105.425 U16.16@161.425,103.275
  Bottom Layer w0.3: v1(58.5,39.5) 58.423,39.423 57.923,39.423 57.5,39 57.5,38 59.5,36 68,36 71.55,39.55 119.05,39.55 123.5,44 132.5,44 146,57.5 154.528,57.5 v1(160.528,63.5)
NetU9_27: U9.27 U10.1 | length 213.2
  Top Layer w0.3: v1(60,41.5) 60.077,41.577 60.253,41.577 61.24,42.563 61.24,43.364 U9.27@61.25,43.374 ; v1(106.807,41.148) 106.807,38.693 111.21,34.29 v1(147.066,34.29) ; U10.1@155.625,115.775 155.625,118.125 v1(157.5,120)
  Bottom Layer w0.3: v1(60,41.5) 60,40.922 59.577,40.498 59.577,38.923 60.781,37.719 67.719,37.719 71.275,41.275 88.923,41.275 89.05,41.148 v1(106.807,41.148) ; v1(147.066,34.29) 150.368,34.29 165.5,49.422 165.5,92 169.5,96 169.5,119 167.5,121 158.5,121 v1(157.5,120)
NetU9_28: U9.28 U10.16 | length 211.9
  Top Layer w0.3: v1(60.5,40) 60.5,40.054 61.75,41.304 U9.28@61.75,43.374 ; v1(103,42) 103,40.5 110.353,33.147 v1(143.51,33.147) ; U10.16@161.375,115.775 161.375,120.883 v1(162.192,121.7)
  Bottom Layer w0.3: v1(60.5,40) 60.5,39.023 61.073,38.45 67.45,38.45 71,42 v1(103,42) ; v1(143.51,33.147) 151.16,33.147 166.25,48.237 166.25,91.25 170.5,95.5 170.5,119.5 168,122 162.5,122 162.196,121.696 v1(162.192,121.7)
NetU9_29: U9.29 U10.15 | length 212.6
  Top Layer w0.3: U9.29@62.25,43.374 62.25,41.167 61.624,40.541 61.624,39.968 61.941,39.651 62.241,39.651 62.392,39.5 v1(62.5,39.5) ; v1(101,43.2) 101,40 109.123,31.877 v1(140.97,31.877) ; U10.15@161.375,115.125 161.989,115.125 162.164,115.3 162.172,115.3 162.5,115.628 162.5,119.5 164.5,121.5 167,121.5 v1(171.5,117)
  Bottom Layer w0.3: v1(62.5,39.5) 64.379,39.5 64.879,39 67,39 71,43 98.117,43 98.317,43.2 v1(101,43.2) ; v1(140.97,31.877) 151.638,31.877 166.775,47.014 166.775,90.275 171.5,95 v1(171.5,117)
NetU9_36: U9.36 U11.3 | length 45.6
  Top Layer w0.3: U9.36@65.626,46.75 69.75,46.75 70.5,46 77.5,46 79.65,48.15 v1(85.85,48.15) ; v1(106.045,44.958) 107.808,44.958 108.25,45.4 U11.3@108.475,45.4
  Bottom Layer w0.3: v1(85.85,48.15) 98.35,48.15 101.5,45 106.003,45 v1(106.045,44.958)
NetU15_8: U15.8 U16.4 | length 105
  Top Layer w0.3: v1(80.264,87.376) 81.153,87.376 81.58,87.803 U15.8@81.58,88.784 ; v1(88,104.2) 88.076,104.2 88.376,104.5 140,104.5 141,103.5 144,103.5 146.175,101.325 U16.4@155.575,101.325
  Bottom Layer w0.3: v1(80.264,87.376) 73.787,87.376 72.675,88.488 72.675,94.675 75,97 78,97 84.5,103.5 87.3,103.5 v1(88,104.2)
OSC_IN: C17.2 U9.10 U17.10 Y1.1 | length 71.5
  Top Layer w0.3: C17.2@48.5,33.025 50.625,33.025 Y1.1@50.7,33.1 ; C17.2@48.6,33 44.5,33 42.5,35 42.5,42.5 48.2,48.2 53.645,48.2 53.685,48.24 54.364,48.24 U9.10@54.374,48.25 ; Y1.1@51,33.1 50.95,33.1 50.5,32.65 50.5,32 53.95,28.55 61.325,28.55 64.275,31.5 80,31.5 82.446,33.946 U17.10@82.446,37.538
OSC_OUT: C18.1 U9.11 U17.11 Y1.3 | length 59.8
  Top Layer w0.3: U9.11@54.374,47.75 48.75,47.75 47,46 47,41 51,37 53.2,37 54.7,35.5 Y1.3@55,35.5 ; Y1.3@55.3,35.5 56.7,35.5 C18.1@57.225,34.975 ; C18.1@57.848,35 58.941,35 61.441,32.5 v1(71.5,32.5) ; v1(74.5,30.5) 80.5,30.5 85.04,35.04 U17.11@85.04,37.5
  Bottom Layer w0.3: v1(71.5,32.5) 71.5,31 72,30.5 v1(74.5,30.5)
OUT_A: R28.2 U16.5 U18.8 U19.1 U19.2 | length 110
  Top Layer w0.3: U18.8@128.875,54.275 129.475,54.275 130.5,55.3 v1(130.5,55.885) ; U16.5@155.575,100.675 152.675,100.675 149,97 v1(149,64.3) 149,49.501 150.114,48.387 151.892,48.387 152.781,49.276 155.734,49.276 157.226,47.784 157.226,40.513 160.149,37.59 U19.1@160.815,37.59 ; 160.147,37.465 159.766,37.084 159.766,36.449 160.147,36.068 160.396,36.068 160.398,36.07 161.165,36.07 U19.2@161.29,36.195 ; U19.1@161.115,37.465 160.94,37.465 U19.1@160.815,37.59 ; R28.2@162.557,39.878 161.417,39.878 160.401,38.862 160.401,38.179 160.815,37.765 U19.1@160.815,37.59
  Bottom Layer w0.3: v1(130.5,55.885) 132.112,55.885 132.996,55 136.364,55 145.364,64 148.624,64 148.924,64.3 v1(149,64.3)
RXD: D1.2 U3.25 U9.37 | length 41.9
  Top Layer w0.3: U3.25@60.425,68.925 60.425,69.316 61.109,70 64,70 64.35,70.35 64.4,70.35 D1.2@64.5,70.45 ; D1.2@64.5,70.5 D1.2@64.5,70.45 ; U9.37@65.626,47.25 v1(71.75,47.25) ; v1(66.5,58.5) 66.5,67.5 64.5,69.5 D1.2@64.5,70.45
  Bottom Layer w0.3: v1(66.5,58.5) 70,58.5 74.5,54 74.5,49.5 72.266,47.266 71.766,47.266 v1(71.75,47.25)
S3A: U16.6 U20.8 | length 45.7
  Top Layer w0.3: v1(123.5,88) 123.5,88.094 124.125,88.719 U20.8@124.125,89.725 ; v1(149.775,87.5) 149.775,96.775 153.025,100.025 U16.6@155.575,100.025
  Bottom Layer w0.3: v1(123.5,88) 124.249,87.251 136.749,87.251 137.5,86.5 148.775,86.5 v1(149.775,87.5)
SCLK: R31.2 U9.30 U17.13 | length 36.9
  Top Layer w0.3: U9.30@62.75,43.374 62.76,43.364 62.76,41.24 70,34 v1(73,34) ; v1(86.5,35) 86.551,34.949 87.082,34.949 88.604,36.471 89,36.471 ; R31.2@89,34.4 89,36.471 ; U17.13@90.066,37.538 89,36.471
  Bottom Layer w0.3: v1(73,34) 74,33 84.5,33 v1(86.5,35)
SDIO: R32.2 U9.31 U17.14 | length 48.7
  Top Layer w0.3: U9.31@63.25,43.374 63.253,43.371 63.253,42.079 66.791,38.54 70.244,35.088 70.341,35.088 70.504,34.925 v1(70.612,34.925) ; v1(70,30.5) 71.4,29.1 89.29,29.1 90.726,30.536 90.726,35.657 U17.14@92.606,37.538 92.606,35.006 R32.2@92.5,34.9
  Bottom Layer w0.3: v1(70,30.5) 70,30.56 70.358,30.918 70.358,34.563 70.612,34.817 v1(70.612,34.925)
TXD: D2.2 U3.26 U9.42 | length 46.5
  Top Layer w0.3: U3.26@59.925,68.925 59.925,69.925 60.5,70.5 61.224,70.5 ; D2.2@61.5,71.5 61.4,71.4 61.4,70.676 61.224,70.5 ; U9.42@65.626,49.75 65.636,49.74 66.315,49.74 66.365,49.69 66.487,49.69 66.677,49.5 73.5,49.5 75.5,51.5 75.5,54 69.5,60 69.5,70.5 67.5,72.5 63.5,72.5 63,72 63,71 62.5,70.5 61.224,70.5
USBGND: C1.1 C3.1 C7.1 D5.2 DS1.2 IC1.3 IC1.4 IC1.5 IC1.6 J1.A1_B12 J1.B1_A12 J1.SH1 J1.SH2 J1.SH3 J1.SH4 R2.1 R3.2 U1.2 U1.8 | length 149.4
  Top Layer w0.3: v1(31.325,83.05) 31.417,83.05 v1@31.525,83.05 ; DS1.2@36.371,95.011 DS1.2@36.5,95.14 ; R3.2@40.2,79.5 R3.2@40.476,79.776 ; 40.476,80.524 40.524,80.524 ; D5.2@45.5,78.15 v1(45.5,80) ; C1.1@53.594,94.509 55.792,94.509 56.01,94.727 IC1.6@56.16,94.727 55.623,94.727 55.245,95.105 55.245,95.553 ; 55.86,96.027 55.245,96.027 ; IC1.5@56.01,95.377 55.421,95.377 55.245,95.553 ; IC1.3@56.01,96.677 55.421,96.677 55.245,96.501 55.245,96.027 ; C7.1@65.875,79.325 C7.1@66,79.45 ; 55.245,95.553 55.245,96.027
  Top Layer w0.5: J1.SH4@27.306,72.568 J1.SH2@31.486,72.568 ; J1.SH3@27.306,81.208 J1.SH1@31.486,81.208 ; v1@31.417,83.05 31.417,83.088 31.563,83.088 31.75,83.275 32.875,83.275 33.139,83.011 33.139,80.891 J1.A1_B12@32.336,80.088 ; J1.SH2@31.542,72.568 31.773,72.799 31.773,73.638 31.823,73.688 J1.B1_A12@32.061,73.688 32.111,73.638 32.45,73.638 33.508,72.58 ; J1.SH1@31.542,81.208 31.773,80.977 31.773,80.138 31.823,80.088 J1.A1_B12@32.061,80.088 J1.A1_B12@32.336,80.088 ; v1(33.157,70.632) 33.157,70.686 33.508,71.037 33.508,72.58 ; DS1.2@36.371,95.011 35.3,95.011 34.325,94.036 34.325,81.675 ; DS1.2@36.5,95.14 38.035,96.675 43.152,96.675 47.108,92.719 ; R2.1@39.825,73.9 41.225,73.9 v1(42.414,72.711) ; R3.2@40.476,79.776 40.476,80.524 ; v1(40.5,69.5) 36.589,69.5 33.508,72.58 ; 40.524,80.524 v1(42,82) 41.025,82.975 35.625,82.975 34.325,81.675 ; C1.1@53.594,94.509 53.509,94.424 50.863,94.424 C3.1@50.8,94.361 50.2,94.361 48.558,92.719 47.108,92.719 ; U1.2@63.5,79.325 63.52,79.345 64.29,79.345 64.31,79.325 C7.1@65.875,79.325 ; U1.8@63.5,86.984 63.5,88 63,88.5 ; C7.1@66,79.45 v1(66,81.029) ; v1(66,87) 64.5,88.5 63,88.5 ; J1.A1_B12@32.336,80.088 33.356,80.088 34.325,81.058 34.325,81.675 ; 47.108,92.719 50.827,89 62.5,89 63,88.5
  Bottom Layer w0.454: 29.2,80.925 v1(31.325,83.05)
  Bottom Layer w0.5: 29.2,80.925 29.2,72.125 30.675,70.65 33.14,70.65 v1(33.157,70.632) ; v1(40.5,69.5) 41.5,70.5 41.5,71.797 v1(42.414,72.711) ; v1(42,82) 43.5,82 v1(45.5,80) ; v1(66,81.029) v1(66,87)
VBUS: C1.2 C3.2 D5.5 F1.1 IC1.1 IC1.2 J1.A4_B9 J1.B4_A9 R1.2 U1.1 | length 106.6
  Top Layer w0.3: J1.A4_B9@32.061,79.288 33.748,79.288 34.46,80 v1(35,80) ; v1(34.6,73.8) 34.492,73.8 34.317,73.975 33.8,73.975 33.287,74.488 32.211,74.488 J1.B4_A9@32.061,74.488 32.211,74.338 32.71,74.338 36.548,70.5 42.5,70.5 44.85,72.85 ; F1.1@40,102.5 40,102.901 40.325,103.226 40.774,103.226 42.357,101.643 45.296,101.643 48.917,98.022 50.439,98.022 C3.2@50.8,97.661 53.26,97.661 53.594,97.327 54.86,97.327 ; v1(42,89) 43.45,90.45 R1.2@43.45,93 ; D5.5@45.5,75.85 45.5,73.5 44.85,72.85 ; IC1.2@56.16,97.327 54.86,97.327 ; IC1.1@56.16,97.977 55.51,97.977 54.86,97.327 ; U1.1@63.5,78.094 63.5,76.581 62.611,75.692 57.317,75.692 54.475,72.85 44.85,72.85
  Bottom Layer w0.3: v1(34.6,73.8) 34.6,73.841 35.05,74.291 35.05,75.5 34.325,76.225 34.325,77.85 35,78.525 v1(35,80) 35,84 35.5,84.5 37.5,84.5 v1(42,89) 43.5,89 44.069,89.569 44.069,100.574 v1(43,101.643)
VDD: C5.2 C10.2 C11.2 C21.2 C23.2 C29.2 C30.2 C33.2 C34.2 C41.1 C42.1 C43.1 D4.2 J2.1 R20.2 R21.2 R22.2 R23.2 R24.2 R25.2 R27.1 R31.1 R32.1 R33.1 U2.5 U3.6 U9.8 U10.2 U11.1 U11.5 U12.25 U13.25 U13.28 U15.2 U16.2 U17.1 U17.15 U17.16 U18.2 U20.2 | length 336.8
  Top Layer w0.3: C21.2@51.625,52.125 51.625,50.56 52.135,50.05 53.162,50.05 53.337,49.874 53.337,49.486 53.513,49.31 53.737,49.31 53.798,49.25 U9.8@54.374,49.25 ; C10.2@54,64.9 56.475,64.9 57.075,65.5 U3.6@58,65.5 ; v1(74.4,81.35) 73.375,82.375 73.375,94.6 74.55,95.775 77.579,95.775 80.66,92.694 81.57,92.694 U15.2@81.58,92.684 ; U12.25@81.452,70.75 83.1,70.75 C29.2@83.6,70.25 ; C29.2@83.6,70 83.6,68.25 84.275,67.575 C30.2@84.275,67.5 ; C29.2@84.025,69.825 84.025,70.075 84.525,70.575 85.246,70.575 v1(86.722,72.051) ; R31.1@88.325,31.15 R31.1@89,31.15 ; R31.1@89,31.35 R31.1@89.5,31.85 ; U17.15@95.146,37.538 95.146,35.254 C41.1@95.2,35.2 ; R27.1@96.139,47.625 96.364,47.625 96.814,47.175 96.814,46.95 97.281,46.483 97.281,45.868 U17.1@97.686,45.463 ; U17.16@97.686,37.538 97.686,35.844 C43.1@98.171,35.359 ; C23.2@106.426,47.826 106.426,46.926 106.652,46.7 U11.1@108.475,46.7 ; U11.5@110.701,46.05 111.242,46.05 111.677,45.615 115.185,45.615 v1(117.125,43.675) ; v1(113.65,41.45) 113.573,41.373 113.573,41.148 113.5,41.074 113.5,38.85 116.525,35.825 150.633,35.825 154.125,39.317 v1@154.125,45.55 ; v1(117.3,70.7) 117.3,68.95 119.525,66.725 R23.2@121.3,66.725 123.2,66.725 126.475,70 126.475,70.85 127.125,71.5 130.858,71.5 131.196,71.163 131.216,71.163 131.379,71 U13.28@132.095,71 ; R24.2@119.5,79.15 123.35,79.15 R25.2@123.5,79 ; v1(126.5,86.024) 126.526,86.05 133.425,86.05 v1(138.5,91.125) ; C34.2@127.5,74 129.2,74 129.887,73.313 130.037,73.313 130.4,72.95 131.406,72.95 131.855,72.5 U13.25@132.095,72.5 ; U18.2@128.875,50.375 129.489,50.375 129.664,50.2 129.672,50.2 129.95,49.922 129.95,44.575 133.05,41.475 139.725,41.475 144.525,46.275 147.8,46.275 150,44.075 D4.2@150,42.43 ; D4.2@149.987,42.451 150.992,42.451 v1(154.112,45.571) ; v1(152.725,90.575) 151.85,89.7 151.85,81.1 154.975,77.975 154.975,66.225 164.15,57.05 v1(164.15,53.675) 164.15,51.5 U2.5@164.1,51.45 165.725,51.45 C5.2@165.775,51.5 ; v1(154.6,118.625) 154.55,118.575 154.55,115.45 154.865,115.135 155.615,115.135 U10.2@155.625,115.125 ; v1(155.4,107.15) 155.4,105.489 154.35,104.439 154.35,103.078 154.628,102.8 154.636,102.8 154.811,102.625 U16.2@155.575,102.625
  Bottom Layer w0.3: v1(74.4,81.35) 77.1,78.65 82.1,78.65 86.775,73.975 86.775,72.104 v1(86.722,72.051) ; v1(113.65,41.45) 115.925,41.45 117.125,42.65 v1(117.125,43.675) ; v1(117.3,70.7) 117.3,76.824 v1(126.5,86.024) ; v1(138.5,91.125) 138.975,91.125 139.625,91.775 151.525,91.775 v1(152.725,90.575) ; v1@154.125,45.55 155.225,46.65 160.175,46.65 162.8,49.275 162.8,52.825 163.149,53.174 163.541,53.174 164.042,53.675 v1(164.15,53.675) ; v1(154.6,118.625) 153,117.025 153,109.55 v1(155.4,107.15)
VIN1N: R27.2 R30.1 U17.2 | length 11.3
  Top Layer w0.3: R30.1@91.313,47.879 91.763,47.429 92.398,47.429 93.648,46.179 94.43,46.179 ; U17.2@95.146,45.463 94.43,46.179 ; R27.2@96.139,50.425 94.494,50.425 93.81,49.741 93.81,46.799 93.98,46.629 94.43,46.179
X0: J3.6 U12.3 U15.6 | length 74.5
  Top Layer w0.3: v1(79,85) 78.923,85.077 78.626,85.077 77.597,86.106 77.597,87.597 80.084,90.084 U15.6@81.58,90.084 ; U12.3@79.75,74.952 79.75,76.25 79,77 79,80.324 79.176,80.5 93.932,80.5 103.88,70.552 J3.6@103.88,70.16
  Bottom Layer w0.3: v1(79,85) 88.5,85 103.063,70.437 103.603,70.437 J3.6@103.88,70.16
X1: J3.5 U12.4 U15.7 | length 70.3
  Top Layer w0.3: U12.4@79.25,74.952 79.237,74.965 79.237,75.311 79.187,75.361 79.187,75.888 78.5,76.576 78.5,80.5 79,81 96,81 103.453,73.547 103.453,73.519 103.88,73.092 J3.5@103.88,72.7 ; v1(81.28,86.106) 79.588,86.106 79,86.694 79,88.017 80.407,89.424 81.57,89.424 U15.7@81.58,89.434
  Bottom Layer w0.3: v1(81.28,86.106) 89.898,86.106 103.027,72.977 103.603,72.977 J3.5@103.88,72.7
X2: J3.4 U12.5 U15.9 | length 57.2
  Top Layer w0.3: U12.5@78.75,74.952 78.737,74.965 78.737,75.311 78.687,75.361 78.687,75.752 78,76.439 78,80.636 78.864,81.5 98,81.5 103.88,75.62 J3.4@103.88,75.24 ; U15.9@87.33,88.784 89.716,88.784 v1(91,87.5)
  Bottom Layer w0.3: v1(91,87.5) 102.983,75.517 103.603,75.517 J3.4@103.88,75.24
X3: J3.3 U12.6 U15.10 | length 56.7
  Top Layer w0.3: U12.6@78.25,74.952 78.237,74.965 78.237,75.311 78.187,75.361 78.187,75.615 77.5,76.303 77.5,81 78.5,82 99,82 102.943,78.057 103.603,78.057 J3.3@103.88,77.78 ; U15.10@86.875,89.375 90.625,89.375 91.5,88.5 v1(92.5,88.5)
  Bottom Layer w0.3: v1(92.5,88.5) 102.943,78.057 103.603,78.057 J3.3@103.88,77.78
X4: J3.2 U12.7 U15.11 | length 56.1
  Top Layer w0.3: U12.7@77.75,74.952 77.737,74.965 77.737,75.311 77.687,75.361 77.687,75.479 77,76.166 77,81.5 78,82.5 101.7,82.5 J3.2@103.88,80.32 ; U15.11@86.875,90.025 86.885,90.015 93.384,90.015 93.899,89.5 v1(94,89.5)
  Bottom Layer w0.3: v1(94,89.5) 102.903,80.597 103.603,80.597 J3.2@103.88,80.32
X5: J3.1 U12.8 U15.12 | length 55
  Top Layer w0.3: U12.8@77.25,74.952 77.25,75.192 76.55,75.892 76.55,81.686 77.814,82.95 J3.1@103.79,82.95 ; U15.12@86.875,90.675 96.065,90.675 J3.1@103.79,82.95 ; J3.1@103.88,82.86 J3.1@103.79,82.95
X6: J3.10 U12.17 U18.11 | length 71.3
  Top Layer w0.3: U12.17@77.25,70.048 76.048,70.048 75.5,69.5 75.5,62.5 79,59 100.5,59 ; J3.10@103.88,60 102.5,60 101.5,59 100.5,59 ; U18.11@123.125,52.975 118.702,52.975 118.227,52.5 99.268,52.5 98,53.768 98,56.5 100.5,59
X7: J3.9 U12.18 U18.12 | length 79.6
  Top Layer w0.3: U12.18@77.75,70.048 77.737,70.035 77.737,69.571 77.512,69.345 76.345,69.345 76,69 76,63 79.5,59.5 99.5,59.5 102.54,62.54 J3.9@103.88,62.54 ; v1(97,57.5) 96.923,57.423 96.423,57.423 96,57 96,55.131 99.131,52 118.364,52 118.689,52.325 U18.12@123.125,52.325
  Bottom Layer w0.3: v1(97,57.5) 97.016,57.516 97.516,57.516 102.54,62.54 J3.9@103.88,62.54
X8: J3.8 U12.19 U15.4 | length 87.6
  Top Layer w0.3: v1(75.5,83.762) 74.295,84.967 74.295,86.614 78.865,91.184 80.758,91.184 80.783,91.209 80.791,91.209 80.966,91.384 U15.4@81.58,91.384 ; U12.19@78.25,70.048 78.237,70.035 78.237,69.689 78.187,69.639 78.187,69.385 77.698,68.895 76.676,68.895 76.5,68.719 76.5,63.364 79.864,60 98.479,60 103.559,65.08 J3.8@103.88,65.08
  Bottom Layer w0.3: v1(75.5,83.762) 76.262,83 83,83 100.513,65.487 103.081,65.487 103.488,65.08 J3.8@103.88,65.08
X9: J3.7 U12.20 U15.5 | length 82.9
  Top Layer w0.3: v1(77,84.877) 76.413,84.877 75.692,85.598 75.692,86.614 79.812,90.734 U15.5@81.58,90.734 ; U12.20@78.75,70.048 78.737,70.035 78.737,69.689 78.687,69.639 78.687,69.248 77.884,68.445 77.327,68.445 77,68.118 77,63.5 80,60.5 96.76,60.5 J3.7@103.88,67.62
  Bottom Layer w0.3: v1(77,84.877) 77.877,84 87.5,84 J3.7@103.88,67.62
pads on no net: D5.1 D5.6 IC1.13 IC1.14 J1. J1.A8 J1.B8 U3.1 U3.2 U3.9 U3.10 U3.11 U3.12 U3.13 U3.14 U3.15 U3.16 U3.17 U3.18 U3.19 U3.20 U3.21 U3.22 U3.23 U3.24 U3.27 U3.28 U9.1 U9.2 U9.3 U9.4 U9.5 U9.6 U9.7 U9.13 U9.14 U9.15 U9.16 U9.17 U9.23 U9.24 U9.25 U9.26 U9.32 U9.33 U9.34 U9.35 U9.38 U9.39 U9.40 U9.41 U9.43 U9.44 U9.47 U9.48 U9.49 U9.50 U9.51 U9.52 U9.53 U9.54 U9.55 U9.56 U9.57 U9.58 U9.59 U9.62 U9.63 U9.64 U12.2 U12.21 U12.22 U12.23 U13.2 U13.21 U13.22 U13.23 U14.7 U14.8 U14.14 U16.9 U17.6 U17.12

## Polygon pours and split planes (outlines as drawn)
VDD on Top Layer "NONET_L-01_P-001" (solid, remove dead copper, pour order 0): 143.15,122.325 143.3,122.475 173.5,122.475 173.5,93.65 172.45,93.65 156.025,93.65 156.025,70.45 171.05,70.45 171.05,29.625 26.65,29.625 26.65,66.975 47.2,66.975 48.875,66.975 54.7,66.975 54.7,73.125 72.9,73.125 72.8,97.075 82.3,97.075 92.625,97.075 143.475,97.075 143.475,112.225 143.475,122.625
GND_ISO on Int1 (GND) (split plane): 177.29,25.91 25.91,25.91 25.91,126.49 177.29,126.49
5V_ISO on Int2 (PWR) (split plane): 177.29,25.91 25.91,25.91 25.91,126.49 177.29,126.49

## Other copper
Top Layer:
  region net 5V_ISO: 74.65,71.85 74.65,71.65 74.749,71.65 76.55,71.65 76.55,71.85
  pour cut-out: 75.891,71.75 74.175,71.75 74.175,71.7 72.975,70.5 72.975,70.55 74.175,71.75 74.15,71.75 72.9,70.5 73.075,70.5 74.175,71.6 74.175,71.75 75.549,71.75 75.649,71.65
  text "3.3V" at 94.379,122.929 h1.52
  text "1.8V" at 57.404,121.539 h1.52
  text "2.5V" at 77.579,120.479 h1.52
  text "4.0V" at 104.371,117.404 h1.52 r90
  text "4.5V" at 122.296,115.879 h1.52 r90
  text "UML CAPSTONE 26'" at 27.305,111.76 h1.52
  text "25-304 NUWC" at 28.067,108.966 h1.52
  text "+" at 151.729,39.304 h1.52
  text "+" at 143.029,38.279 h1.52

## Text inside footprints (layer, text, board x,y; h text height)
J1: Mechanical 13 "PCB EDGE" at 24.806,71.488 h0.41 r270
U9: Top Overlay "*" at 52.685,52.746 h1.27; Mechanical 13 "*" at 52.685,52.746 h1.27
U12: Top Overlay "*" at 80.432,75.46 h1.27; Mechanical 13 "*" at 80.591,74.483 h0.64
U13: Top Overlay "*" at 133.115,67.79 h1.27 r180; Mechanical 13 "*" at 132.956,68.768 h0.64 r180